# Altium PCB HTSSOP-16_L5.0-W4.4-P0.65-LS6.4-BL-EP_2022-06-29.pcbdoc
Units mm, origin at the board's own origin, x right, y up, seen from the top; angles counter-clockwise.
Board outline 949.33 x 721.21 mm, 2 copper layers (Top Layer, Bottom Layer); 1 components, 0 nets, 17 pads, 4 vias.
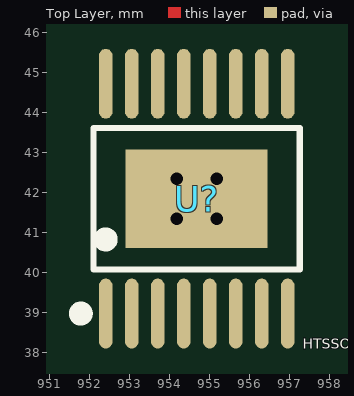
[diagram p0: Top Layer view]
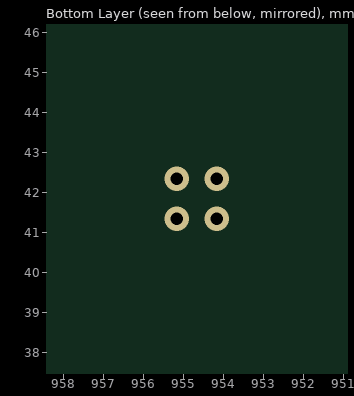
[diagram p1: Bottom Layer view, seen from below]

## Layer stack, top to bottom
Top Layer: signal copper (thickness not stored)
Dielectric: dielectric 0.32, FR-4, Dk 4.8
Bottom Layer: signal copper (thickness not stored)

## Board outline
974.726,25.4 25.4,25.4 25.4,746.614 974.726,746.614

## Components (designator, comment, footprint, x,y, rotation, side; value= is the part's Value field where it differs from the comment)
U? "HTSSOP-16_L5.0-W4.4-P0.65-LS6.4-BL-EP" HTSSOP-16_L5.0-W4.4-P0.65-LS6.4-BL-EP 497.714,385.88 r0 top

## Footprints (in the part's own frame and the unit in brackets; to place one, negate y for a bottom-side part, rotate by r counter-clockwise, add the part's x,y. Pads: shape width x height; smd on the part's side, far side on the other; paste and mask are expansions set on the pad)
HTSSOP-16_L5.0-W4.4-P0.65-LS6.4-BL-EP [mm]
  oval 0.343x1.747 smd: 1(454.686,-346.903) 2(455.336,-346.903) 3(455.986,-346.903) 4(456.636,-346.903) 5(457.286,-346.903) 6(457.936,-346.903) 7(458.586,-346.903) 8(459.236,-346.903) 9(459.236,-341.157) 10(458.586,-341.157) 11(457.936,-341.157) 12(457.286,-341.157) 13(456.636,-341.157) 14(455.986,-341.157) 15(455.336,-341.157) 16(454.686,-341.157)
  rect 3.55x2.46 smd: 17(456.961,-344.03)
  silkscreen extent 453.91,-347.05 459.54,-342.26

## Via types
v1: diameter 0.61, hole 0.305, Top Layer to Bottom Layer, tented both sides, 4 vias

## Nets (pads, with @x,y where several pads share a name; then routed paths per layer and width w, separated by ;. In a path a pad name is that pad's centre, name@x,y a point inside that pad or via, vN(x,y) a via of type N, cw(c..) or ccw(c..) an arc to the next point about the centre after c; other vN are vias at no path point)
pads on no net: U?.1 U?.2 U?.3 U?.4 U?.5 U?.6 U?.7 U?.8 U?.9 U?.10 U?.11 U?.12 U?.13 U?.14 U?.15 U?.16 U?.17
copper on no net:
  other v1: 954.175,41.35 955.175,41.35 954.175,42.35 955.175,42.35